# Altium PCB KEYBOARD.PcbDoc
Units mm, origin at the board's own origin, x right, y up, seen from the top; angles counter-clockwise.
Board outline 99.82 x 100.33 mm, 2 copper layers (Top Layer, Bottom Layer); 62 components, 55 nets, 236 pads, 71 vias.
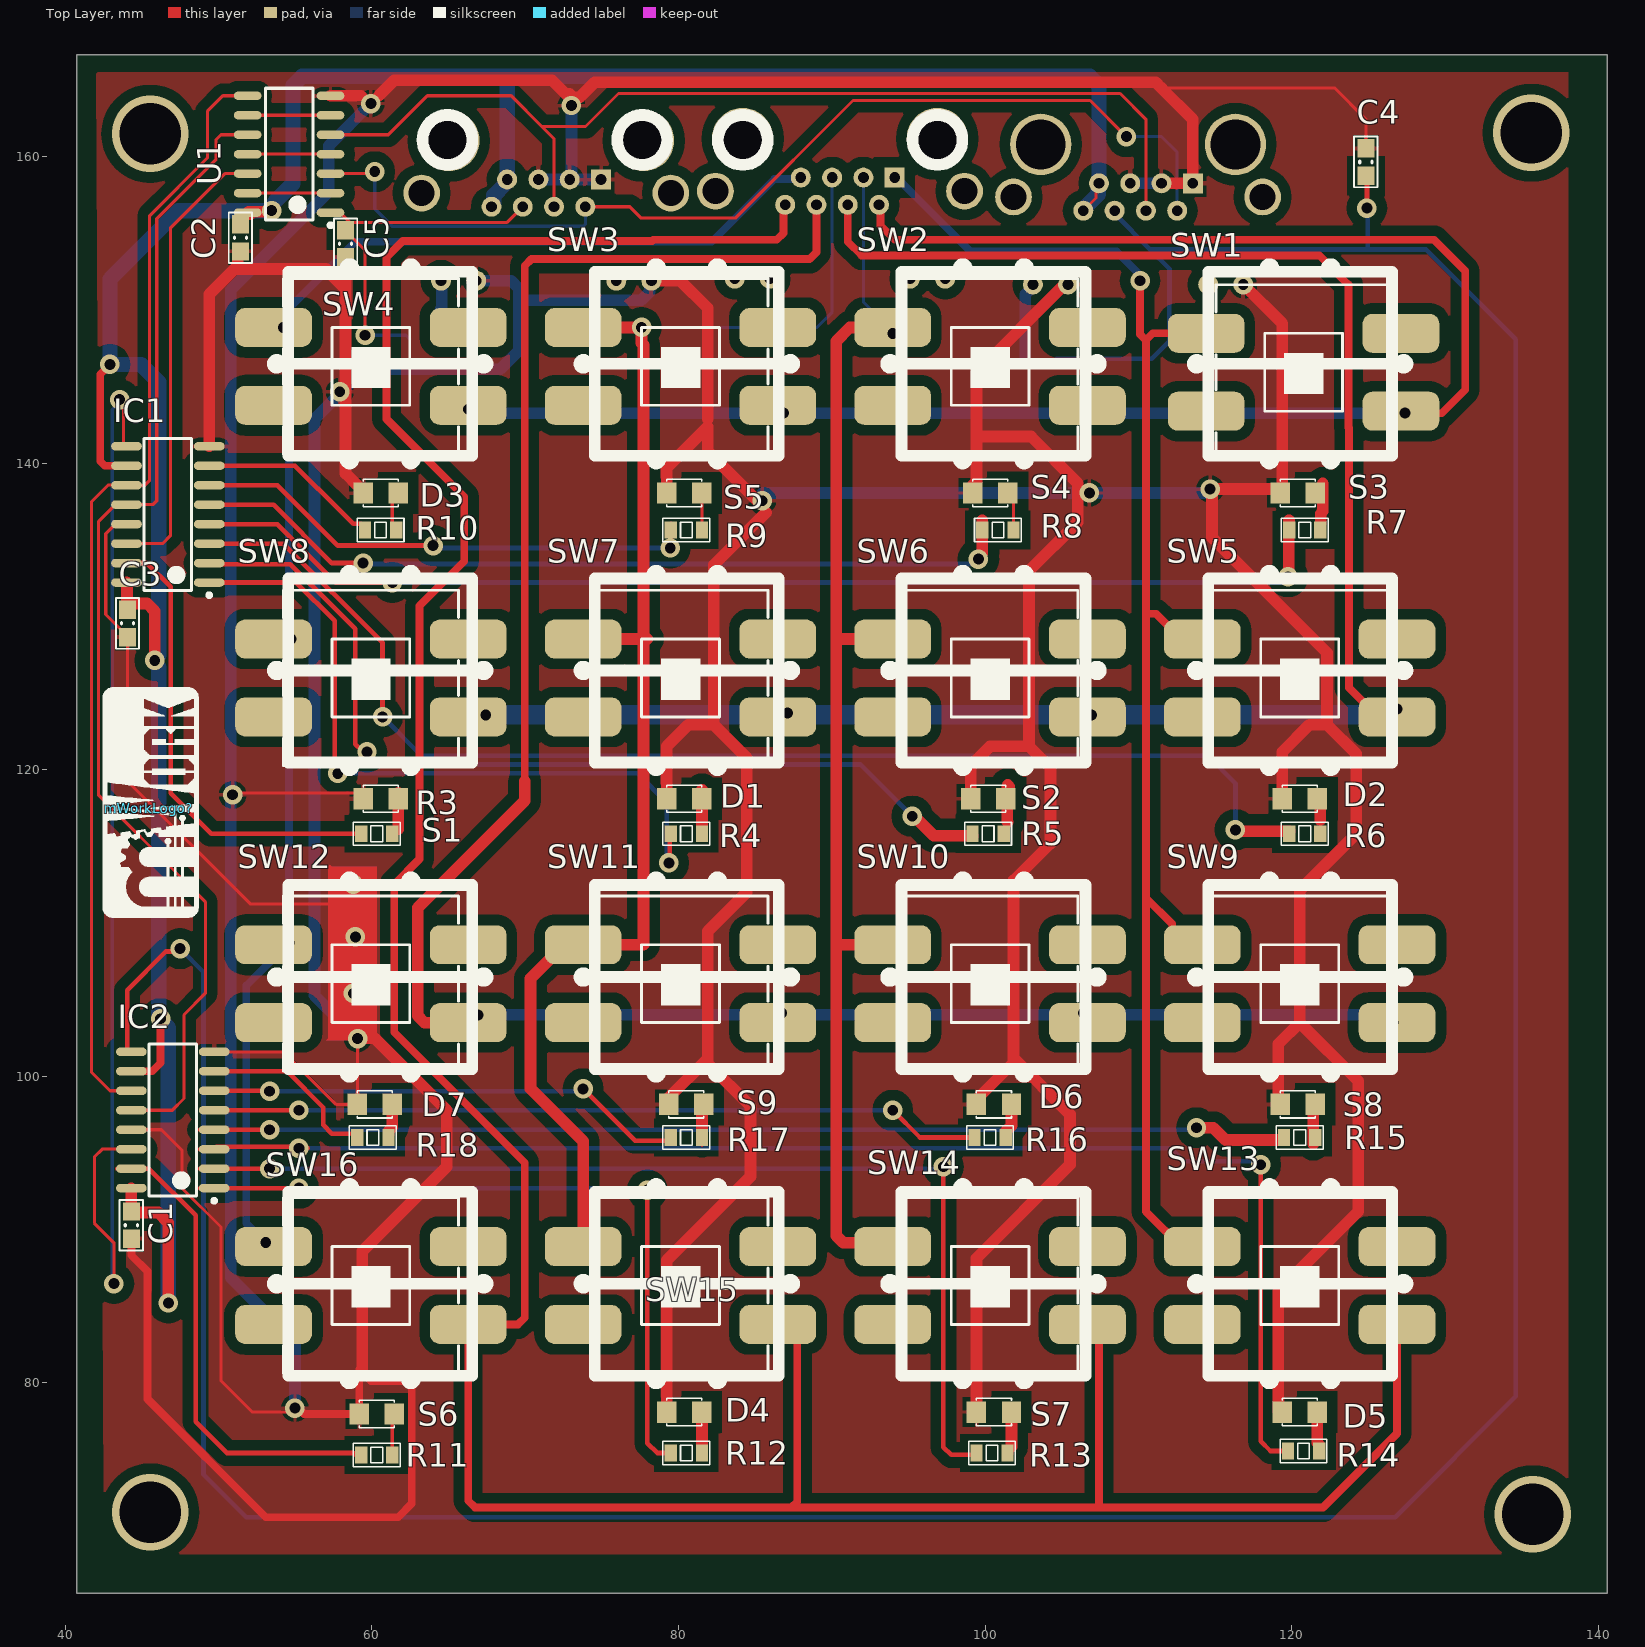
[diagram p0: Top Layer view]
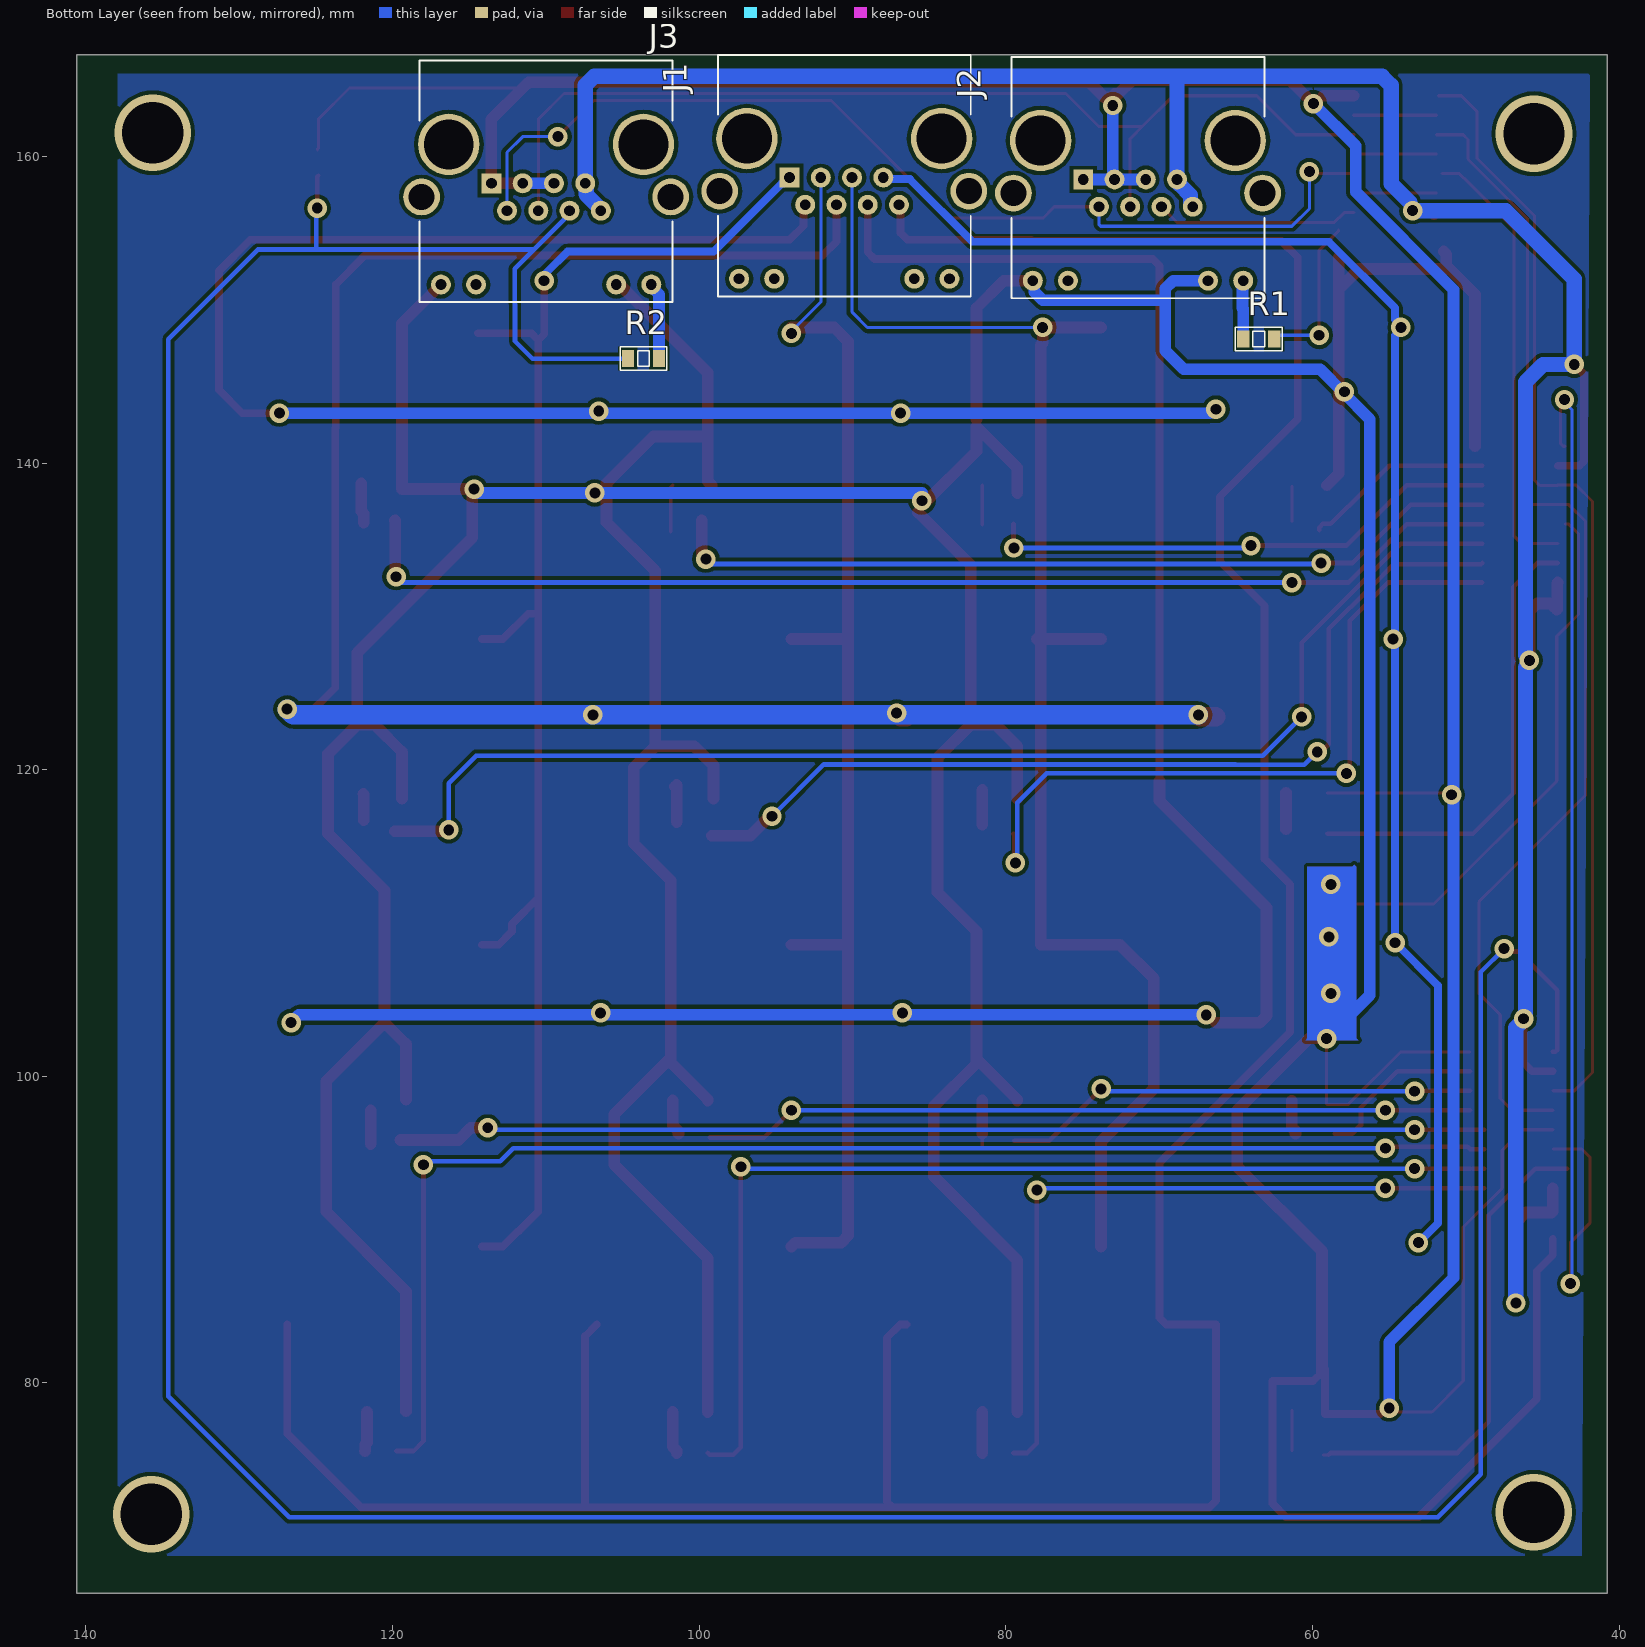
[diagram p1: Bottom Layer view, seen from below]
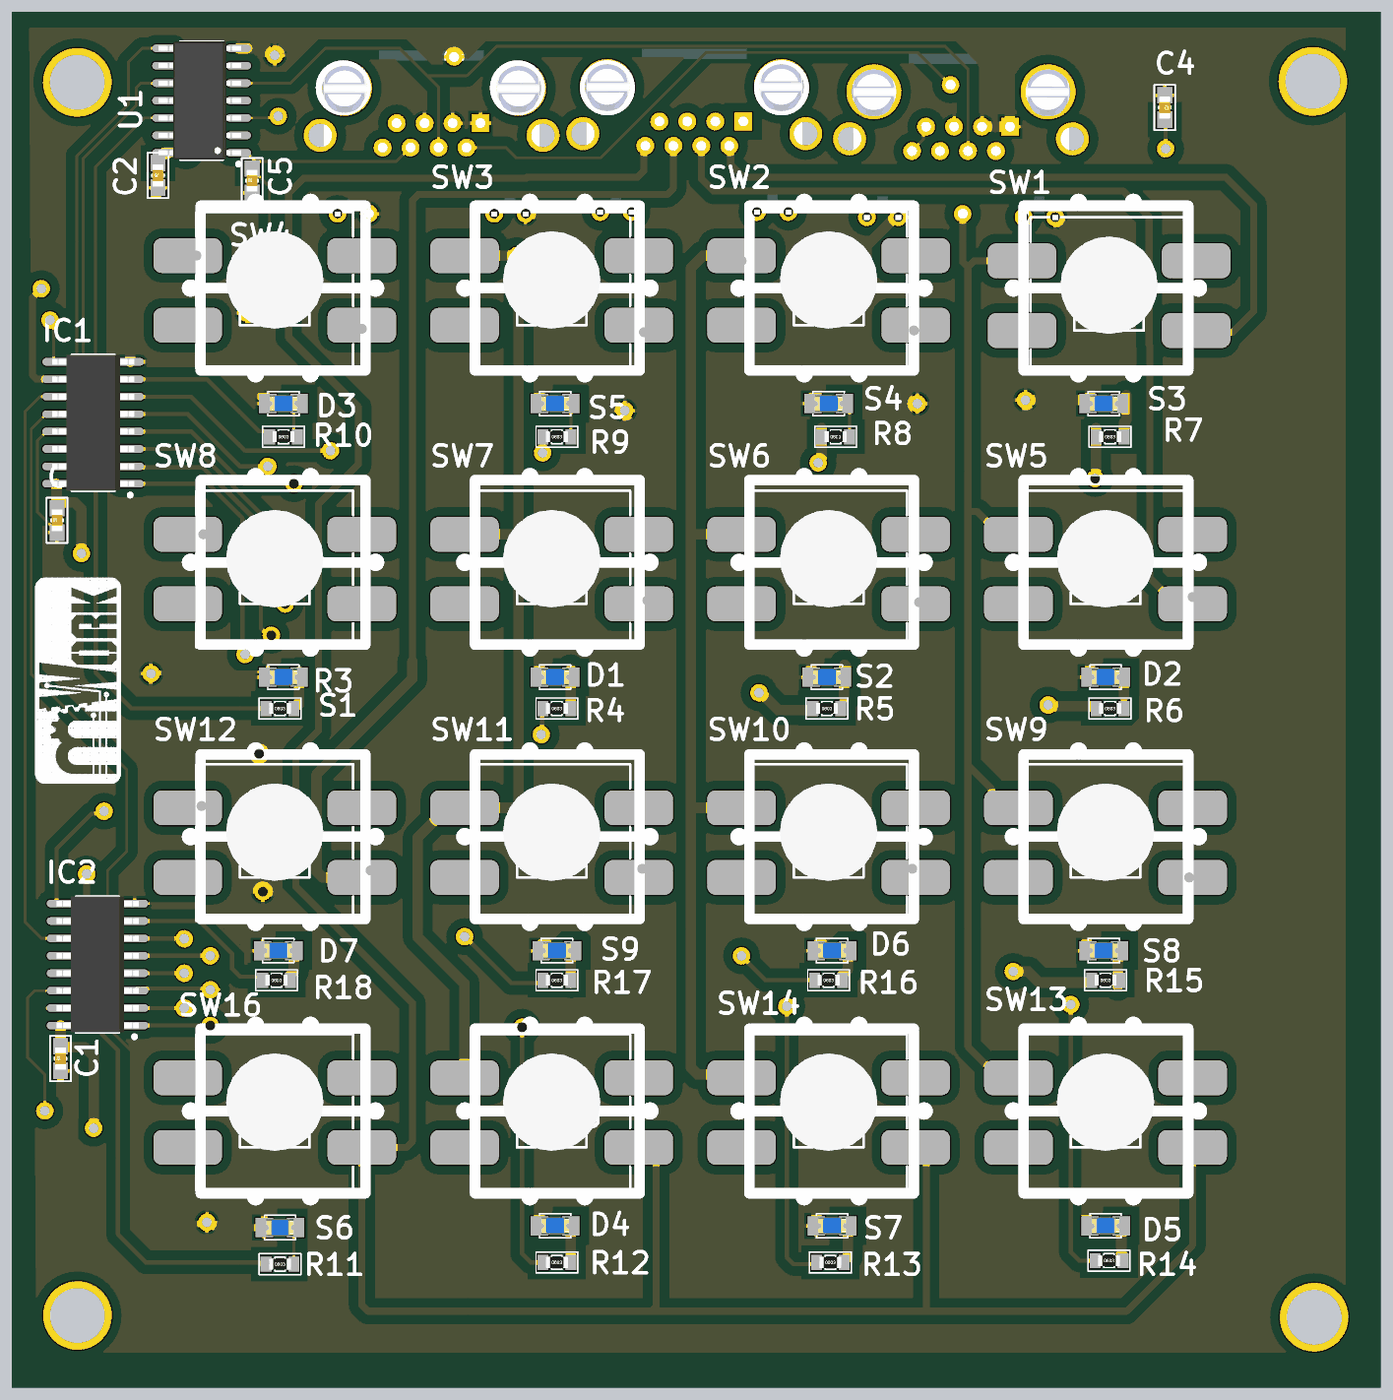
[diagram p2: 3D render of the assembled board from above, using the file's embedded part models]
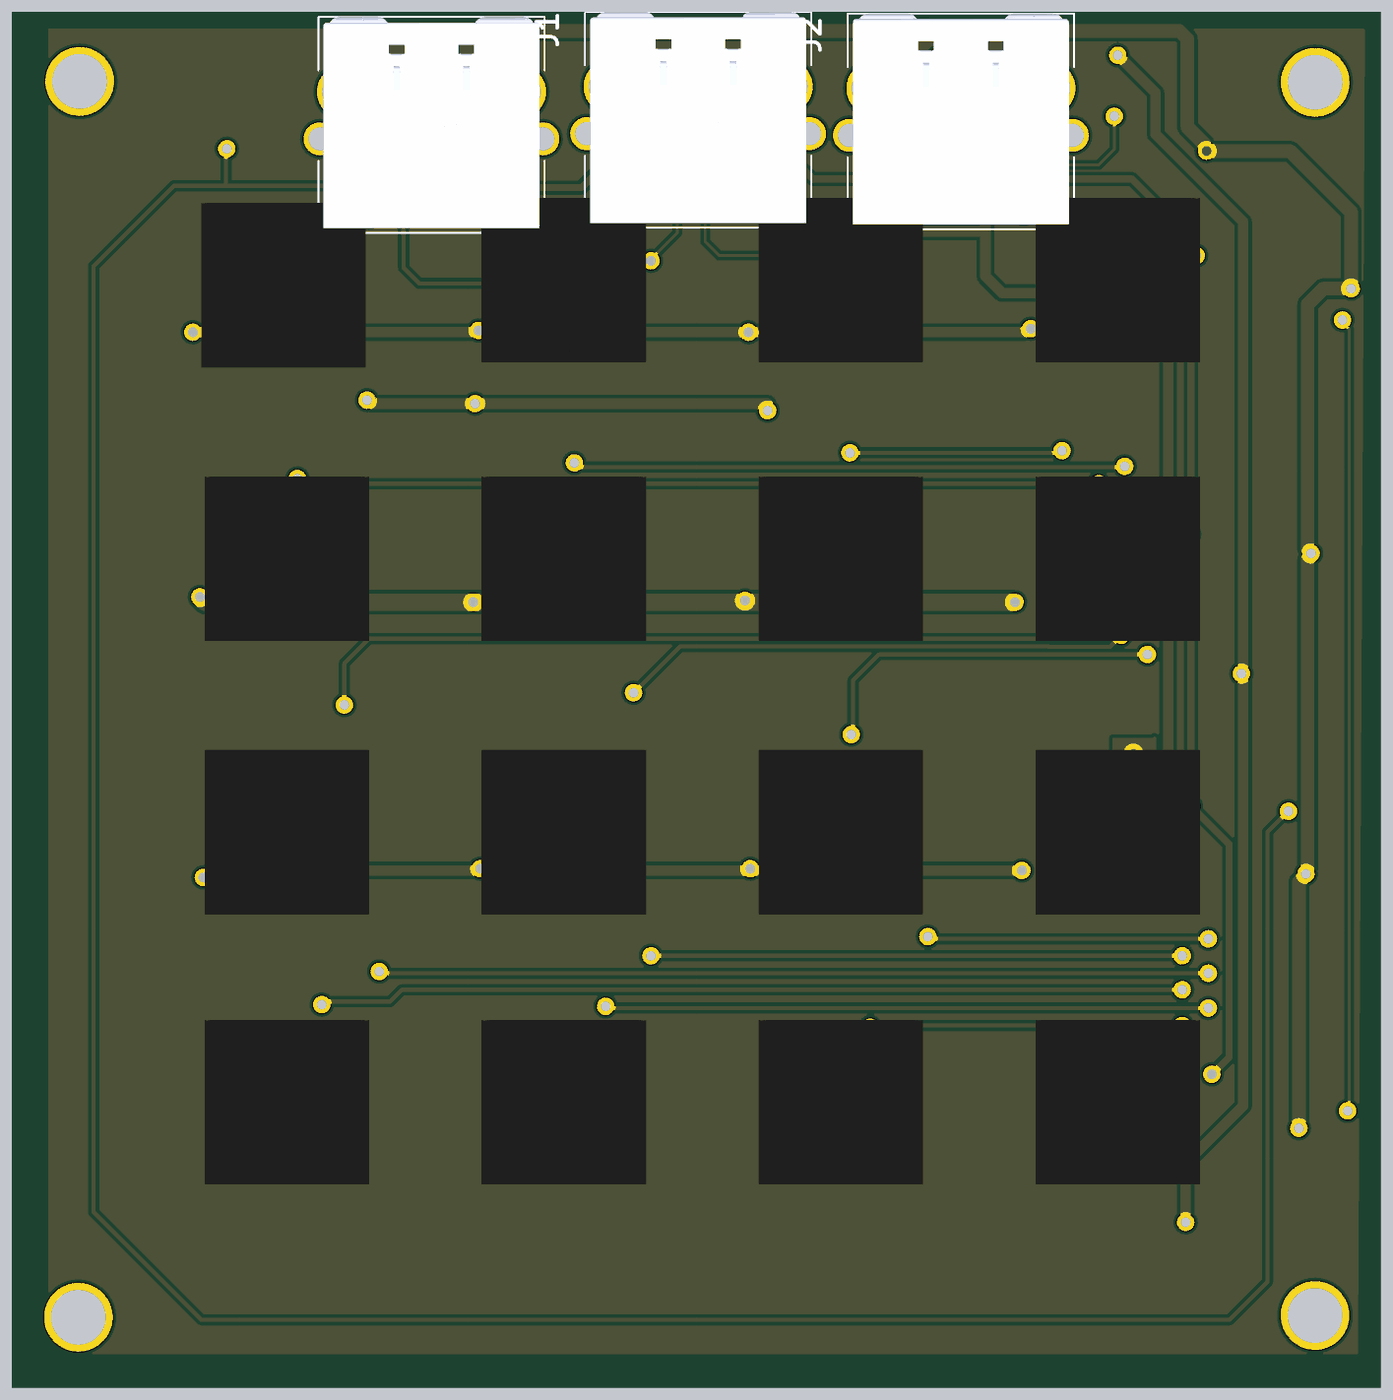
[diagram p3: 3D render of the assembled board from below, using the file's embedded part models]

## Layer stack, top to bottom
Top Solder: solder mask 0.0102, Solder Resist, Dk 3.5
Top Layer: signal copper 0.0356
Dielectric 1: dielectric 0.32, FR-4, Dk 4.8
Bottom Layer: signal copper 0.0356
Bottom Solder: solder mask 0.0102, Solder Resist, Dk 3.5

## Board outline
40.767,66.294 140.589,66.294 140.589,166.624 40.767,166.624

## Design rules (kind name [scope] priority, off if disabled: settings)
Clearance bot [InNamedPolygon('GND_L01_P000')] p1: gap=0.7 ignorepadtopadclearanceinfootprint=FALSE
Clearance [All] p2: gap=0.254 ignorepadtopadclearanceinfootprint=FALSE except(0: Arc-Hole Track-Hole SMDPad-Hole THPad-Hole Via-Hole Fill-Hole Poly-Hole Region-Hole Text-Hole)
PolygonConnect [All] p1: connectstyle=Relief reliefconductorwidth=0.254 reliefentries=4 polygonreliefangle="90 Angle" airgapwidth=0.254
RoomDefinition KEYBOARD [InComponentClass('KEYBOARD')] p1: confinementstyle=ConfineIn formatcopy=TRUE lockcomponents=FALSE outline 141.732,67.818 218.821,67.818 218.821,109.728 141.732,109.728
RoomDefinition KEYBOARD [InComponentClass('KEYBOARD')] p2: confinementstyle=ConfineIn formatcopy=TRUE lockcomponents=FALSE outline 178.943,26.924 185.928,26.924 185.928,39.878 178.943,39.878
RoutingVias [All] p1: holewidth=0.711 width=1.27 viastyle="Through Hole" minholewidth=0.711 minwidth=1.27 maxholewidth=0.711 maxwidth=1.27
SolderMaskExpansion [All] p1: expansion=0.102 istentingtop=FALSE
Width [All] p1: maxlimit=2.54 minlimit=0.203 preferedwidth=1.016
30 further rules are at their usual default settings.

## Classes and differential pairs
component class KEYBOARD: SW1 SW2 SW3 SW4 SW5 SW6 SW7 SW8 SW9 SW10 SW11 SW12 SW13 SW14 SW15 SW16

## Components (designator, comment, footprint, x,y, rotation, side; value= is the part's Value field where it differs from the comment)
C1 "CN" CN-SMD-0603_big 44.323,90.297 r90 top value=33pF
C2 "CN" CN-SMD-0603_big 51.435,154.686 r90 top value=33pF
C3 "CN" CN-SMD-0603_big 44.069,129.54 r90 top value=33pF
C4 "CN" CN-SMD-0603_big 124.841,159.639 r270 top value=33pF
C5 "CN" CN-SMD-0603_big 58.293,154.305 r90 top value=33pF
D1 "LED" LED-0805-Blue 81.534,118.11 r180 top value="LED 3 - 5 ly 2 Colour"
D2 "LED" LED-0805-Blue 121.666,118.11 r180 top value="LED 3 - 5 ly 2 Colour"
D3 "LED" LED-0805-Blue 61.722,138.049 r180 top value="LED 3 - 5 ly 2 Colour"
D4 "LED" LED-0805-Blue 81.534,78.105 r180 top value="LED 3 - 5 ly 2 Colour"
D5 "LED" LED-0805-Blue 121.666,78.105 r180 top value="LED 3 - 5 ly 2 Colour"
D6 "LED" LED-0805-Blue 101.727,98.171 r180 top value="LED 3 - 5 ly 2 Colour"
D7 "LED" LED-0805-Blue 61.341,98.171 r180 top value="LED 3 - 5 ly 2 Colour"
IC1 "74HC595" SO16 46.703,136.652 r180 top
IC2 "74HC595" SO16 47.023,97.155 r180 top
J1 "615008142121" RJ45_8P8C 90.537,158.748 r0 bottom locked
J2 "615008142121" RJ45_8P8C 71.38,158.623 r0 bottom locked
J3 "615008142121" RJ45_8P8C 109.982,158.369 r0 bottom locked
mWorkLogo? "LogoMwork" LogoMwork15*6 45.466,117.475 r90 top
R1 "R" RES-SMD-0603_BIG 63.5,148.082 r180 bottom
R2 "R" RES-SMD-0603_BIG 103.632,146.812 r0 bottom
R3 "R" RES-SMD-0603_BIG 60.325,115.824 r0 top
R4 "R" RES-SMD-0603_BIG 80.518,115.824 r0 top
R5 "R" RES-SMD-0603_BIG 100.203,115.824 r0 top
R6 "R" RES-SMD-0603_BIG 120.852,115.824 r0 top
R7 "R" RES-SMD-0603_BIG 120.852,135.636 r0 top
R8 "R" RES-SMD-0603_BIG 100.838,135.636 r0 top
R9 "R" RES-SMD-0603_BIG 80.518,135.636 r0 top
R10 "R" RES-SMD-0603_BIG 60.579,135.636 r0 top
R11 "R" RES-SMD-0603_BIG 60.325,75.311 r0 top
R12 "R" RES-SMD-0603_BIG 80.518,75.438 r0 top
R13 "R" RES-SMD-0603_BIG 100.457,75.438 r0 top
R14 "R" RES-SMD-0603_BIG 120.777,75.565 r0 top
R15 "R" RES-SMD-0603_BIG 120.523,96.012 r0 top
R16 "R" RES-SMD-0603_BIG 100.33,96.012 r0 top
R17 "R" RES-SMD-0603_BIG 80.518,96.012 r0 top
R18 "R" RES-SMD-0603_BIG 60.071,96.012 r0 top
S1 "LED" LED-0805-Blue 61.722,118.11 r180 top value="LED 3 - 5 ly 2 Colour"
S2 "LED" LED-0805-Blue 101.346,118.11 r180 top value="LED 3 - 5 ly 2 Colour"
S3 "LED" LED-0805-Blue 121.539,138.049 r180 top value="LED 3 - 5 ly 2 Colour"
S4 "LED" LED-0805-Blue 101.473,138.049 r180 top value="LED 3 - 5 ly 2 Colour"
S5 "LED" LED-0805-Blue 81.534,138.049 r180 top value="LED 3 - 5 ly 2 Colour"
S6 "LED" LED-0805-Blue 61.468,77.978 r180 top value="LED 3 - 5 ly 2 Colour"
S7 "LED" LED-0805-Blue 101.727,78.105 r180 top value="LED 3 - 5 ly 2 Colour"
S8 "LED" LED-0805-Blue 121.539,98.171 r180 top value="LED 3 - 5 ly 2 Colour"
S9 "LED" LED-0805-Blue 81.661,98.171 r180 top value="LED 3 - 5 ly 2 Colour"
SW1 "SW" SW4B_SMD 127.127,148.463 r180 top locked value="Button chip 4 pin"
SW2 "SW" SW4B_SMD 106.68,148.844 r180 top locked value="Button chip 4 pin"
SW3 "SW" SW4B_SMD 86.487,148.844 r180 top locked value="Button chip 4 pin"
SW4 "SW" SW4B_SMD 66.294,148.844 r180 top locked value="Button chip 4 pin"
SW5 "SW" SW4B_SMD 126.873,128.524 r180 top locked value="Button chip 4 pin"
SW6 "SW" SW4B_SMD 106.68,128.524 r180 top locked value="Button chip 4 pin"
SW7 "SW" SW4B_SMD 86.487,128.524 r180 top locked value="Button chip 4 pin"
SW8 "SW" SW4B_SMD 66.294,128.524 r180 top locked value="Button chip 4 pin"
SW9 "SW" SW4B_SMD 126.873,108.585 r180 top locked value="Button chip 4 pin"
SW10 "SW" SW4B_SMD 106.68,108.585 r180 top locked value="Button chip 4 pin"
SW11 "SW" SW4B_SMD 86.487,108.585 r180 top locked value="Button chip 4 pin"
SW12 "SW" SW4B_SMD 66.294,108.585 r180 top locked value="Button chip 4 pin"
SW13 "SW" SW4B_SMD 126.873,88.9 r180 top locked value="Button chip 4 pin"
SW14 "SW" SW4B_SMD 106.68,88.9 r180 top locked value="Button chip 4 pin"
SW15 "SW" SW4B_SMD 86.487,88.9 r180 top locked value="Button chip 4 pin"
SW16 "SW" SW4B_SMD 66.294,88.9 r180 top locked value="Button chip 4 pin"
U1 "7414" SO14 54.61,160.147 r180 top

## Footprints (in the part's own frame and the unit in brackets; to place one, negate y for a bottom-side part, rotate by r counter-clockwise, add the part's x,y. Pads: shape width x height; smd on the part's side, far side on the other; paste and mask are expansions set on the pad)
CN-SMD-0603_big [mm]
  rect 1.2x1.1 smd: 1(-0.889,0) 2(0.889,0)
  silkscreen extent -1.65,-0.76 1.65,0.76, body extent -0.8,-0.4 0.8,0.4, height 0.3
LED-0805-Blue [mil]
  rect 50x55 smd: 1(0,0) 2(90,0)
  silkscreen extent 0,-35 90,35, body extent 5,-25 85,25, height 43
LogoMwork15*6 [mm] "15mm*6mm"
  silkscreen extent -7.14,-3.26 7.9,2.99
RES-SMD-0603_BIG [mm]
  rect 0.8x1.1 smd: 1(-1.016,0) 2(1.016,0)
  silkscreen extent -1.52,-0.76 1.52,0.76, body extent -0.8,-0.4 0.8,0.4, height 0.43
RJ45_8P8C [mm] "https://www.thegioiic.com/products/cong-rj45-cai-8pin-8p8c-co-led-16x16mm"
  rect 1.3x1.3 hole 0.7: 1(3.57,0.125)
  round 1.3 hole 0.7: 2(2.55,1.905) 3(1.53,0.125) 4(0.51,1.905) 5(-0.51,0.125) 6(-1.53,1.905) 7(-2.55,0.125) 8(-3.57,1.905) L1+(4.57,6.725) L1-(6.86,6.725) L2+(-6.86,6.725) L2-(-4.57,6.725)
  round 4 hole 3.25: S1(6.35,-2.415) S2(-6.35,-2.415)
  round 2.4 hole 1.7: S3(-8.125,1.015) S4(8.125,1.015)
  silkscreen extent -8.25,-7.88 8.25,7.88, body extent -7.87,-7.88 7.87,7.51, height 12.84
SO14 [mm] "SOIC, 14-Leads, Body 8.60x3.90mm, Pitch 1.27mm, IPC Medium Density"
  oval 1.8x0.55 smd: 1(-2.7,3.81) 2(-2.7,2.54) 3(-2.7,1.27) 4(-2.7,0) 5(-2.7,-1.27) 6(-2.7,-2.54) 7(-2.7,-3.81) 8(2.7,-3.81) 9(2.7,-2.54) 10(2.7,-1.27) 11(2.7,0) 12(2.7,1.27) 13(2.7,2.54) 14(2.7,3.81)
  silkscreen extent -2.83,-4.3 1.55,4.76, body extent -2.87,-4.3 3.13,4.3, height 1.75
SO16 [mm] "SOIC, 16-Leads, Body 9.90x3.91mm, Pitch 1.27mm, IPC Medium Density"
  oval 2x0.55 smd: 1(-2.7,4.445) 2(-2.7,3.175) 3(-2.7,1.905) 4(-2.7,0.635) 5(-2.7,-0.635) 6(-2.7,-1.905) 7(-2.7,-3.175) 8(-2.7,-4.445) 9(2.7,-4.445) 10(2.7,-3.175) 11(2.7,-1.905) 12(2.7,-0.635) 13(2.7,0.635) 14(2.7,1.905) 15(2.7,3.175) 16(2.7,4.445)
  silkscreen extent -2.83,-4.95 1.55,5.39, body extent -3,-4.95 3,4.95, height 1.4
SW4B_SMD [mm] "SW button 4pin, 450 x 450 mil"
  rrect50% 5x2.54 smd: 1(0,5.08) 2(12.7,0) 3(12.7,5.08) 4(0,0)
  silkscreen extent 0.63,-3.17 12.06,8.26, body extent 0.35,-4.22 12.35,7.78, height 5

## Part data
D1 D2 D3 D4 D5 D6 D7 S1 S2 S3 S4 S5 S6 S7 S8 S9: library part "LED SMD"
IC1 IC2: library part 74595, "8 Bit Serial input - Parallel Output"
J1 J2 J3: library part RJ45_8P8C, "Conn, Rj45 Jack, Shld, 1port, 8p8c, Cat5", Package=None, Availability=Unavailable, MF="WÃ¼rth Elektronik", MP=615008142121, Price=None, SnapEDA_Link=https://www.snapeda.com/parts/615008142121/W%C3%BCrth%20Elektronik/view-part/1118273/?ref=snap
SW1 SW2 SW3 SW4 SW5 SW6 SW7 SW8 SW9 SW10 SW11 SW12 SW13 SW14 SW15 SW16: library part SW4, "Switch button 4 pin"
U1: "IC, M74HC04M, Hex Inverter, SO-14", Text Field1=ST, Text Field2=M74HC04M1R, Text Field3=Mouser, Text Field4=511-M74HC04M, Text Field5=SO-14, Text Field6=.22

## Via types
v1: diameter 1.27, hole 0.711, Top Layer to Bottom Layer, 67 vias
v2: diameter 5, hole 4, Top Layer to Bottom Layer, 4 vias

## Nets (pads, with @x,y where several pads share a name; then routed paths per layer and width w, separated by ;. In a path a pad name is that pad's centre, name@x,y a point inside that pad or via, vN(x,y) a via of type N, cw(c..) or ccw(c..) an arc to the next point about the centre after c; other vN are vias at no path point)
+5: C1.2 C2.2 C3.2 IC1.10 IC1.16 IC2.10 IC2.16 J2.7 J2.8 J3.7 J3.8 U1.14 | length 195
  Top Layer w0.203: J3.8 107.237,157.289 107.237,158.049 J3.7
  Top Layer w0.508: v1(42.926,146.431) 42.291,145.796 42.291,140.125 42.589,139.827 IC1.10 ; IC2.10 44.331,100.338 45.684,100.338 46.228,100.882 v1(46.228,103.759)
  Top Layer w0.762: IC1.16 44.036,132.174 44.036,130.462 C3.2 44.069,130.479 44.238,130.648 44.288,130.648 44.48,130.84 45.347,130.84 45.847,130.34 v1(45.847,127.127) ; IC2.16 C1.2 44.386,91.123 46.075,91.123 46.736,90.462 v1(46.736,85.217) ; U1.14@52.07,156.231 51.964,156.337 U1.14 51.974,156.4 53.404,156.4 v1(53.467,156.464)
  Bottom Layer w1: v1(46.228,103.759) 46.228,103.686 46.736,103.178 v1(46.736,85.217) ; v1@46.229,103.758 46.176,103.811 46.176,104.002 46.102,104.076 46.102,126.681 45.982,126.801 45.982,126.919 45.847,127.054 45.847,127.2 46.102,127.455 46.102,145.288 44.959,146.431 v1(42.926,146.431) 42.927,146.432 42.927,152.003 47.372,156.448 53.451,156.448 v1(53.467,156.464) ; v1@53.659,157.02 54.865,158.226 54.865,164.641 55.451,165.227 106.848,165.227 107.433,164.641 107.433,158.245 107.375,158.187 107.375,157.523 106.562,156.71 106.562,156.695 106.412,156.545 J3.8 ; J2.8 67.81,156.799 67.96,156.949 67.96,157.465 68.68,158.185 68.68,158.267 68.83,158.417 J2.7 68.831,158.499 68.831,164.249 68.835,164.253 68.835,165.211
COL1: J1.1 SW1.2 SW5.2 SW9.2 SW13.2 | length 98.2
  Top Layer w0.508: v1(110.109,151.892) 110.109,148.398 110.49,148.017 ; SW13.2 112.806,88.9 111.79,89.916 111.76,89.916 110.49,91.186 110.49,111.654 ; SW9.2 113.08,108.585 112.211,109.455 112.211,109.933 110.49,111.654 ; SW5.2 112.806,128.524 111.155,130.175 110.49,130.175 ; SW1.2 110.936,148.463 110.49,148.017 ; 110.49,111.654 110.49,130.175 ; 110.49,130.175 110.49,148.017
  Bottom Layer w0.508: J1.1 94.503,158.227 94.63,158.227 99.063,153.794 108.588,153.794 109.963,152.419 109.963,152.038 v1(110.109,151.892)
COL2: J1.3 SW2.2 SW6.2 SW10.2 SW14.2 | length 84.7
  Top Layer w0.762: SW14.2 93.726,89.154 90.743,89.154 90.297,89.6 90.297,108.585 ; SW10.2 90.297,108.585 ; SW6.2 90.424,128.524 90.297,128.397 ; SW2.2 91.186,148.844 90.297,147.955 90.297,128.397 ; 90.297,108.585 90.297,128.397
  Bottom Layer w0.203: J1.3 92.067,150.503 93.98,148.59 v1(93.98,148.463)
COL3: J1.5 SW3.2 SW7.2 SW11.2 SW15.2 | length 97.1
  Top Layer w0.762: SW15.2 73.787,95.758 70.358,99.187 70.358,106.386 72.557,108.585 SW11.2 77.724,108.585 77.724,147.701 77.597,147.828 v1(77.597,148.844) SW3.2 ; SW7.2 77.978,128.524
  Bottom Layer w0.203: v1(77.597,148.844) 89.027,148.844 90.027,149.844 J1.5
COL4: J1.7 SW4.2 SW8.2 SW12.2 SW16.2 | length 99.9
  Bottom Layer w0.508: v1(53.086,89.154) 51.816,90.424 51.816,105.918 v1(54.61,108.712) 54.61,128.524 54.64,128.554 54.64,128.98 54.61,129.01 54.61,148.326 54.326,148.609 54.326,148.707 54.464,148.844 54.326,148.981 54.326,149.079 54.61,149.362 54.61,150.114 58.928,154.432 82.169,154.432 86.257,158.52 87.884,158.52 J1.7
  other v1: 54.737,128.524 54.229,148.844
DIR0: IC1.1 R4.1 | length 47.9
  Top Layer w0.305: IC1.1@48.928,132.207 55.085,132.207 57.578,129.714 57.578,119.968 v1(57.785,119.761) ; v1(79.375,113.919) 79.438,113.983 79.438,115.76 R4.1
  Bottom Layer w0.305: v1(57.785,119.761) 77.343,119.761 79.248,117.856 79.248,114.046 v1(79.375,113.919)
DIR1: IC1.3 R6.1 | length 83.3
  Top Layer w0.305: IC1.3@48.928,134.747 54.229,134.747 60.706,128.27 v1(60.706,123.444)
  Top Layer w0.762: v1(116.332,116.078) 116.417,115.993 R6.1@119.855,115.993
  Bottom Layer w0.305: v1(60.706,123.444) 63.246,120.904 114.554,120.904 116.332,119.126 v1(116.332,116.078)
DIR2: IC1.5 R8.1 | length 55
  Top Layer w0.305: IC1.5@48.928,137.287 53.594,137.287 57.404,133.477 v1(59.436,133.477)
  Top Layer w0.762: v1(99.568,133.731) 99.568,133.868 99.822,134.122 99.822,136.271
  Bottom Layer w0.305: v1(59.436,133.477) 59.493,133.42 99.13,133.42 99.441,133.731 v1(99.568,133.731)
DIR3: IC1.7 R10.1 | length 12.5
  Top Layer w0.305: IC1.7@48.928,139.827 IC1.7 54.991,139.827 56.515,138.303 56.538,138.303 58.807,136.034 59.315,136.034 59.563,135.786 R10.1
DIR4: IC2.1 R12.1 | length 47.3
  Top Layer w0.305: IC2.1@48.801,92.71 IC2.1@49.526,92.71 ; IC2.1 v1@55.626,92.71 ; v1(77.978,92.583) 77.978,76.073 78.613,75.438 R12.1
  Bottom Layer w0.305: v1@55.626,92.71 77.851,92.71 v1(77.978,92.583)
  other v1: 55.245,92.71
DIR5: IC2.3 R14.1 | length 89.8
  Top Layer w0.305: IC2.3@48.801,95.25 IC2.3 49.875,95.402 55.728,95.402 v1@55.816,95.313 ; v1(117.983,94.234) 117.983,76.2 118.619,75.564 118.903,75.564 ; 118.904,75.565 R14.1
  Bottom Layer w0.305: v1@55.816,95.313 112.129,95.313 112.98,94.463 117.754,94.463 v1(117.983,94.234)
  other v1: 55.245,95.313
DIR6: IC2.5 R16.1 | length 50.3
  Top Layer w0.305: IC2.5 v1(55.245,97.79) ; v1(93.98,97.79) 95.758,96.012 R16.1
  Bottom Layer w0.305: v1(55.245,97.79) v1(93.98,97.79)
DIR7: IC2.7 R18.1 | length 11.2
  Top Layer w0.305: IC2.7 54.475,100.33 56.838,97.967 56.838,96.832 57.404,96.266 58.547,96.266
GND: C1.1 C2.1 C3.1 C4.1 C5.1 D1.2 D2.2 D3.2 D4.2 D5.2 D6.2 D7.2 IC1.8 IC1.13 IC2.8 IC2.13 J2.1 J2.3 J2.5 J2.L1- J2.L2- J3.1 J3.3 J3.5 J3.L1- J3.L2- S1.2 S2.2 S3.2 S4.2 S5.2 S6.2 S7.2 S8.2 S9.2 U1.7 | length 794.2
  Top Layer w0.203: IC1.13@43.528,136.017 43.278,136.017 42.647,135.386 42.647,130.123 44.069,128.701 C3.1 44.069,119.253 52.07,111.252 59.323,111.252 59.442,111.371 v1@59.442,102.489 ; IC2.13 46.291,96.52 47.625,95.186 47.625,92.71 50.165,90.17 50.165,80.137 52.197,78.105 v1@54.991,78.105 ; IC2.8 54.229,101.6 57.658,98.171 D7.2 59.077,98.193 v1(59.077,102.466) ; v1(50.927,118.364) 51.054,118.491 S1.2@59.055,118.491 ; 111.506,164.465 122.809,164.465 124.841,162.433 C4.1 ; C4.1@124.901,160.418 C4.1@124.901,160.528
  Top Layer w0.508: C1.1 44.323,88.342 45.377,87.288 45.377,78.956 53.086,71.247 61.722,71.247 62.611,72.136 62.611,80.137 59.944,80.137 59.372,80.709 59.182,80.899 S6.2 55.578,77.978 55.197,78.359 v1(54.991,78.359)
  Top Layer w0.762: IC1.8 49.403,151.003 51.062,152.662 ; C2.1 51.266,153.628 51.266,152.866 51.062,152.662 ; U1.7 59.299,163.957 ; C5.1 58.293,151.334 ; D3.2@59.055,138.557 58.293,139.319 58.293,151.334 ; v1(59.077,102.466) 59.101,102.489 59.442,102.489 60.198,102.489 64.897,97.79 64.897,94.107 59.372,88.582 59.372,80.709 ; 60.452,163.957 61.468,164.973 71.755,164.973 72.658,164.07 72.901,164.07 73.134,163.838 73.541,163.838 74.548,164.845 111.126,164.845 111.506,164.465 113.552,162.419 J3.1 J3.3 ; J2.L1- 80.131,151.898 81.915,150.114 81.915,142.875 ; D4.2 79.248,88.011 84.709,93.472 84.709,98.044 81.915,100.838 81.915,101.155 ; S9.2@79.248,98.425 79.248,98.489 81.915,101.155 ; D1.2 79.248,121.539 80.645,122.936 82.296,122.936 ; S5.2 79.248,139.7 81.915,142.367 81.915,140.779 v1@85.312,137.382 ; 85.725,136.779 82.296,133.35 82.296,122.936 ; S2.2 99.06,120.269 100.33,121.539 102.87,121.539 ; S4.2@99.187,138.557 99.441,138.811 99.441,141.732 ; S7.2 99.441,88.138 105.537,94.234 105.537,97.536 101.854,101.219 ; D6.2@99.441,98.425 99.441,98.489 101.854,100.901 101.854,101.219 ; J3.L2- 105.309,151.541 105.081,151.541 99.441,145.901 99.441,141.732 ; 106.045,137.922 106.045,136.144 102.87,132.969 102.87,121.539 ; 106.045,138.049 106.045,138.684 102.997,141.732 99.441,141.732 ; v1(114.681,138.303) 119.38,138.303 119.38,149.106 J3.L1- ; v1@114.808,137.817 114.808,135.128 122.301,127.635 122.301,122.936 ; D5.2@119.126,78.152 119.126,85.979 124.333,91.186 124.333,99.695 120.523,103.505 ; S8.2@119.126,98.486 119.126,102.108 120.523,103.505 ; D2.2 119.38,121.158 121.158,122.936 122.301,122.936 ; 51.062,152.662 57.015,152.662 57.15,152.527 57.15,152.477 58.293,151.334 ; 81.915,101.155 81.915,109.474 84.455,112.014 84.455,120.777 82.296,122.936 ; 101.854,101.219 101.854,112.776 104.267,115.189 104.267,120.142 102.87,121.539 ; 120.523,103.505 120.523,112.141 124.206,115.824 124.206,121.031 122.301,122.936
  Bottom Layer w0.762: v1(54.991,78.359) 54.991,82.677 50.8,86.868 50.8,151.297 57.187,157.684 57.187,160.692 v1(59.944,163.449) ; v1(59.077,102.466) 56.261,105.283 56.261,142.865 57.975,144.579 57.975,144.589 59.499,146.113 68.389,146.113 69.596,147.32 69.596,150.613 ; J2.L2- 66.816,151.892 69.088,151.892 69.596,151.384 69.596,150.613 ; J2.5 J2.3 ; v1(73.025,163.322) 73.025,158.613 J2.3 ; J2.1 J2.3 ; J2.L1- 78.137,151.795 78.137,151.162 77.588,150.613 69.596,150.613 ; v1@85.471,138.049 v1(106.807,138.049) 114.427,138.049 v1(114.681,138.303) ; J3.5 J3.3
  other v1: 58.801,105.41 58.928,109.093 58.801,112.522 85.471,137.541 57.912,144.653
LATCH1: J2.2 J3.2 U1.3 | length 68.1
  Top Layer w0.203: U1.3 60.071,158.877 v1(60.198,159.004) ; J2.2 76.833,156.718 77.574,155.977 83.714,155.977 91.389,163.652 106.858,163.652 v1(109.22,161.29)
  Bottom Layer w0.203: v1(60.198,159.004) 60.198,156.591 61.341,155.448 73.811,155.448 73.93,155.567 J2.2 ; v1(109.22,161.29) 111.506,161.29 112.532,160.264 J3.2
MOSI1: C5.2 J2.6 R1.2 U1.1 | length 23.6
  Top Layer w0.203: U1.1 57.935,156.337 58.57,155.702 68.834,155.702 J2.6 ; C5.2 58.293,155.144 59.563,153.874 v1(59.563,148.336)
  Bottom Layer w0.203: v1(59.563,148.336) 62.23,148.336 R1.2
NetC4_2: C4.2 IC2.9 J3.6 R2.2 | length 251.7
  Top Layer w0.305: IC2.9 44.157,101.6 44.044,101.713 44.044,105.609 46.581,108.146 47.313,108.146 v1(47.498,108.331) ; C4.2 124.908,158.683 v1(124.908,156.63)
  Bottom Layer w0.305: v1(47.498,108.331) 49.022,106.807 49.022,74.041 51.816,71.247 126.746,71.247 134.62,79.121 134.62,148.082 128.778,153.924 124.968,153.924 ; R2.2 110.871,146.812 112.014,147.955 112.014,150.368 112.031,150.385 112.031,152.671 110.778,153.924 ; J3.6 108.452,156.25 110.778,153.924 ; v1@124.968,156.63 124.968,153.924 ; 110.778,153.924 124.968,153.924
NetD1_1: D1.1 R4.2 | length 2.7
  Top Layer w0.203: D1.1@81.534,118.046 D1.1
  Top Layer w0.762: 81.534,116.417 D1.1@81.534,118.427 ; D1.1@81.534,118.046 D1.1@81.534,118.681
NetD2_1: D2.1 R6.2 | length 1.7
  Top Layer w0.762: 121.868,116.713 121.87,116.715 121.87,118.367 D2.1@121.92,118.416
NetD3_1: D3.1 R10.2 | length 2.3
  Top Layer w0.203: 61.341,136.196 D3.1@61.341,138.493
NetD4_1: D4.1 R12.2 | length 2.7
  Top Layer w0.762: R12.2 D4.1
NetD5_1: D5.1 R14.2 | length 2.6
  Top Layer w0.762: D5.1 121.666,76.103 121.774,75.995 121.774,75.584 R14.2
NetD6_1: D6.1 R16.2 | length 2.3
  Top Layer w0.762: R16.2@101.346,96.266 101.346,96.416 101.727,96.797 D6.1@101.727,98.425
NetD7_1: D7.1 R18.2 | length 2.3
  Top Layer w0.762: R18.2@61.106,96.258 61.106,96.435 61.341,96.67 D7.1@61.341,98.417
NetIC1_9: IC1.9 IC2.14 | length 72.7
  Top Layer w0.203: v1(43.18,86.487) 43.18,89.154 41.91,90.424 41.91,94.742 42.418,95.25 IC2.14 ; IC1.9@43.528,141.097 43.655,141.097 43.815,141.257 43.815,143.602 43.561,143.856 v1(43.561,144.145)
  Bottom Layer w0.203: v1(43.18,86.487) 43.078,86.589 43.078,143.493 43.561,143.975 v1(43.561,144.145)
NetIC1_11: IC1.11 IC2.11 U1.8 | length 73.2
  Top Layer w0.203: IC2.11 42.926,99.06 41.733,100.253 41.733,137.491 42.799,138.557 IC1.11 44.032,138.528 45.167,138.528 45.517,138.878 45.517,156.134 49.276,159.893 49.276,162.941 50.292,163.957 U1.8@51.76,163.957
NetIC1_12: IC1.12 IC2.12 U1.10 | length 76.5
  Top Layer w0.203: IC2.12 46.99,97.79 47.752,98.552 47.752,104.013 49.149,105.41 49.149,111.379 47.625,112.903 42.19,118.338 42.19,136.199 43.278,137.287 45.72,137.287 45.974,137.541 45.974,155.944 49.853,159.824 49.853,161.105 50.165,161.417 U1.10
NetIC1_14: IC1.14 U1.12 | length 29.3
  Top Layer w0.203: IC1.14 46.355,134.747 46.863,135.255 46.863,155.321 49.784,158.242 50.419,158.877 U1.12@51.551,158.877
NetJ1_2: J1.2 SW1.1 SW2.1 SW3.1 SW4.1 | length 114.6
  Top Layer w0.508: v1(127.381,143.256) 129.794,143.256 131.318,144.78 131.318,152.527 129.286,154.559 94.996,154.559 94.107,154.559 93.19,155.476 J1.2@93.19,156.594 ; J1.2@93.19,156.594 93.19,156.74 J1.2 93.087,156.697 J1.2@93.19,156.594
  Bottom Layer w0.762: v1(66.294,143.51) 66.431,143.51 66.685,143.256 v1(86.868,143.256) v1(127.381,143.256)
  other v1: 106.553,143.383
NetJ1_4: J1.4 SW5.1 SW6.1 SW7.1 SW8.1 | length 128
  Top Layer w0.508: J1.4 91.047,154.444 91.948,153.543 121.793,153.543 123.698,151.638 123.698,142.327 123.738,142.287 123.738,125.349 125.643,123.444 SW5.1
  Top Layer w1.27: SW8.1 67.31,123.444 v1(67.437,123.571) ; SW7.1 86.868,123.444 v1(87.122,123.698)
  Bottom Layer w1.27: v1(67.437,123.571) v1(106.934,123.571) 126.492,123.571 v1(126.873,123.952)
NetJ1_6: J1.6 SW9.1 SW10.1 SW11.1 SW12.1 | length 137.7
  Top Layer w0.508: 69.977,119.253 69.977,152.862 70.423,153.308 88.561,153.308 89.007,153.754 J1.6
  Top Layer w0.762: SW12.1 63.438,103.505 62.992,103.951 62.992,110.998 69.977,117.983 69.977,119.253
  Bottom Layer w0.762: v1(66.929,104.013) 126.111,104.013 v1(126.619,103.505)
  other v1: 86.741,104.14 106.426,104.14
NetJ1_8: J1.8 SW13.1 SW14.1 SW15.1 SW16.1 | length 215.5
  Top Layer w0.508: SW15.1 86.887,83.82 87.757,82.95 87.757,72.263 87.376,71.882 ; J1.8 86.864,156.74 86.864,155.005 86.418,154.559 78.359,154.559 78.283,154.483 62.027,154.483 60.96,153.416 60.96,142.875 66.04,137.795 66.04,133.604 63.119,130.683 63.119,114.173 61.468,112.522 61.468,102.87 69.977,94.361 69.977,84.266 69.531,83.82 SW16.1 66.294,72.328 66.74,71.882 87.376,71.882 ; SW14.1 107.442,83.058 107.442,72.009 107.569,71.882 ; SW13.1 126.873,76.708 122.047,71.882 107.569,71.882 ; 87.376,71.882 107.569,71.882
NetJ2_L2+: J2.L2+ R1.1 | length 3.9
  Bottom Layer w0.762: R1.1 64.516,150.064 64.566,150.114 64.566,151.852 J2.L2+
NetJ3_L2+: J3.L2+ R2.1 | length 5
  Bottom Layer w0.762: R2.1 102.616,150.992 103.122,151.498 J3.L2+
NetR3_2: R3.2 S1.1 | length 2.4
  Top Layer w0.762: R3.2@61.722,116.119 S1.1@61.722,118.491
NetR5_2: R5.2 S2.1 | length 2.5
  Top Layer w0.762: 101.454,118.891 101.454,116.605 101.473,116.586 ; 101.473,118.999 101.581,118.891
NetR7_2: R7.2 S3.1 | length 2.6
  Top Layer w0.762: R7.2@121.887,136.102 121.887,136.701 122.036,136.85 S3.1@122.036,138.666
NetR8_2: R8.2 S4.1 | length 3.1
  Top Layer w0.203: S4.1@101.727,138.557 101.854,138.43 101.854,136.271 R8.2@101.854,135.509
NetR9_2: R9.2 S5.1 | length 2.6
  Top Layer w0.203: R9.2@81.534,135.976 S5.1@81.534,138.557
NetR11_2: R11.2 S6.1 | length 2.7
  Top Layer w0.203: R11.2@61.341,75.565 S6.1@61.341,78.223
NetR13_2: R13.2 S7.1 | length 2.8
  Top Layer w0.762: R13.2 101.473,75.588 101.727,75.842 S7.1
NetR15_2: R15.2 S8.1 | length 3
  Top Layer w0.203: R15.2@121.412,96.266 121.412,95.631 R15.2@121.539,95.504
  Top Layer w0.762: R15.2@121.412,95.588 121.412,96.266 S8.1@121.412,97.773
NetR17_2: R17.2 S9.1 | length 2.7
  Top Layer w0.203: R17.2@81.534,95.504 R17.2
  Top Layer w0.762: R17.2@81.534,96.266 S9.1@81.534,98.425
NetU1_2: U1.2 U1.13 | length 5.4
  Top Layer w0.203: U1.13 U1.2
NetU1_4: U1.4 U1.11 | length 5.4
  Top Layer w0.203: U1.11 U1.4
NetU1_6: U1.6 U1.9 | length 5.4
  Top Layer w0.203: U1.9 U1.6
SCK1: J2.4 J3.4 U1.5 | length 68.2
  Top Layer w0.203: U1.5 61.087,161.417 63.627,163.957 69.088,163.957 71.095,161.95 ; J2.4 71.89,161.155 71.095,161.95 ; J3.4 110.492,162.431 108.814,164.109 76.098,164.109 73.939,161.95 71.095,161.95
STEP0: IC1.15 R3.1 | length 30.2
  Top Layer w0.305: IC1.15 45.332,133.477 46.888,131.921 46.888,118.466 49.53,115.824 R3.1@59.026,115.824
STEP1: IC1.2 R5.1 | length 62
  Top Layer w0.305: IC1.2@48.928,133.477 49.008,133.397 54.69,133.397 56.083,132.004 56.111,132.004 58.928,129.187 58.928,121.666 59.309,121.285 59.563,121.285 v1(59.69,121.158)
  Top Layer w0.762: v1(95.25,116.967) 95.387,116.967 96.657,115.697 R5.1@99.187,115.697
  Bottom Layer w0.305: v1(59.69,121.158) 60.528,120.32 65.024,120.32 ; 65.024,120.345 91.872,120.345 v1(95.25,116.967)
STEP2: IC1.4 R7.1 | length 76.3
  Top Layer w0.305: IC1.4@48.928,136.017 53.848,136.017 57.658,132.207 v1(61.341,132.207)
  Top Layer w0.762: v1(119.761,132.588) 119.817,132.644 119.817,136.252 119.836,136.271
  Bottom Layer w0.305: v1(61.341,132.207) 119.38,132.207 v1(119.761,132.588)
STEP3: IC1.6 R9.1 | length 33.8
  Top Layer w0.305: IC1.6@48.928,138.557 53.848,138.557 57.785,134.62 v1(64.008,134.62) ; v1(79.47,134.461) 79.502,134.493 R9.1@79.502,136.022
  Bottom Layer w0.305: v1(64.008,134.62) 64.167,134.461 v1(79.47,134.461)
STEP4: IC2.15 R11.1 | length 31.5
  Top Layer w0.203: R11.1@58.928,75.311 R11.1
  Top Layer w0.305: IC2.15@43.401,93.98 IC2.15 45.466,93.98 48.514,90.932 48.514,77.47 50.546,75.438 58.801,75.438 R11.1@58.928,75.311
STEP5: IC2.2 R13.1 | length 69
  Top Layer w0.305: IC2.2@48.801,93.98 IC2.2@49.526,93.98 ; IC2.2 v1@53.467,93.98 ; v1(97.282,94.107) 97.282,75.819 97.79,75.311 99.314,75.311 R13.1
  Bottom Layer w0.305: v1@53.467,93.98 97.155,93.98 v1(97.282,94.107)
  other v1: 53.34,93.98
STEP6: IC2.4 R15.1 | length 71.1
  Top Layer w0.305: IC2.4@48.801,96.52 IC2.4 v1(53.34,96.52)
  Top Layer w0.762: v1(113.792,96.647) 114.892,96.647 115.696,95.843 R15.1@119.507,95.843
  Bottom Layer w0.305: v1(53.34,96.52) 113.665,96.52 v1(113.792,96.647)
STEP7: IC2.6 R17.1 | length 31.2
  Top Layer w0.305: IC2.6 53.594,99.06 v1@53.626,99.028 ; v1(73.787,99.187) 77.172,95.802 R17.1@79.458,95.802
  Bottom Layer w0.305: v1@53.626,99.028 73.628,99.028 v1(73.787,99.187)
  other v1: 53.34,99.028
pads on no net: J1.L1+ J1.L1- J1.L2+ J1.L2- J1.S1 J1.S2 J1.S3 J1.S4 J2.L1+ J2.S1 J2.S2 J2.S3 J2.S4 J3.L1+ J3.S1 J3.S2 J3.S3 J3.S4 SW1.3 SW1.4 SW2.3 SW2.4 SW3.3 SW3.4 SW4.3 SW4.4 SW5.3 SW5.4 SW6.3 SW6.4 SW7.3 SW7.4 SW8.3 SW8.4 SW9.3 SW9.4 SW10.3 SW10.4 SW11.3 SW11.4 SW12.3 SW12.4 SW13.3 SW13.4 SW14.3 SW14.4 SW15.3 SW15.4 SW16.3 SW16.4
copper on no net:
  other v2: 135.731,71.438 45.561,71.565 45.549,161.475 135.636,161.544

## Polygon pours and split planes (outlines as drawn)
no net on Bottom Layer "NONET_L02_P001" (solid, pour order 1): 41.92,165.392 137.932,165.392 137.932,68.618 137.805,68.745 42.428,68.745
GND on Top Layer "GND_L01_P000" (solid, pour order 0): 42.037,165.481 138.049,165.481 138.049,68.707 137.922,68.834 42.545,68.834

## Other copper
Top Layer:
  region net GND: 60.452,102.362 60.325,102.489 60.325,113.665 57.404,113.665 57.277,113.792 57.15,113.665 57.15,102.489 57.023,102.362
Bottom Layer:
  region net GND: 60.452,102.362 60.325,102.489 60.325,113.665 57.404,113.665 57.277,113.792 57.15,113.665 57.15,102.489 57.023,102.362

## Silkscreen, mask and mechanical layers (free items; w line width, h text height)
Top Overlay:
  drawing of 180 lines, arcs and shapes, not listed
Mechanical 1:
  the board outline again, w0.5